# EAGLE board untitled (EAGLE 6.4)
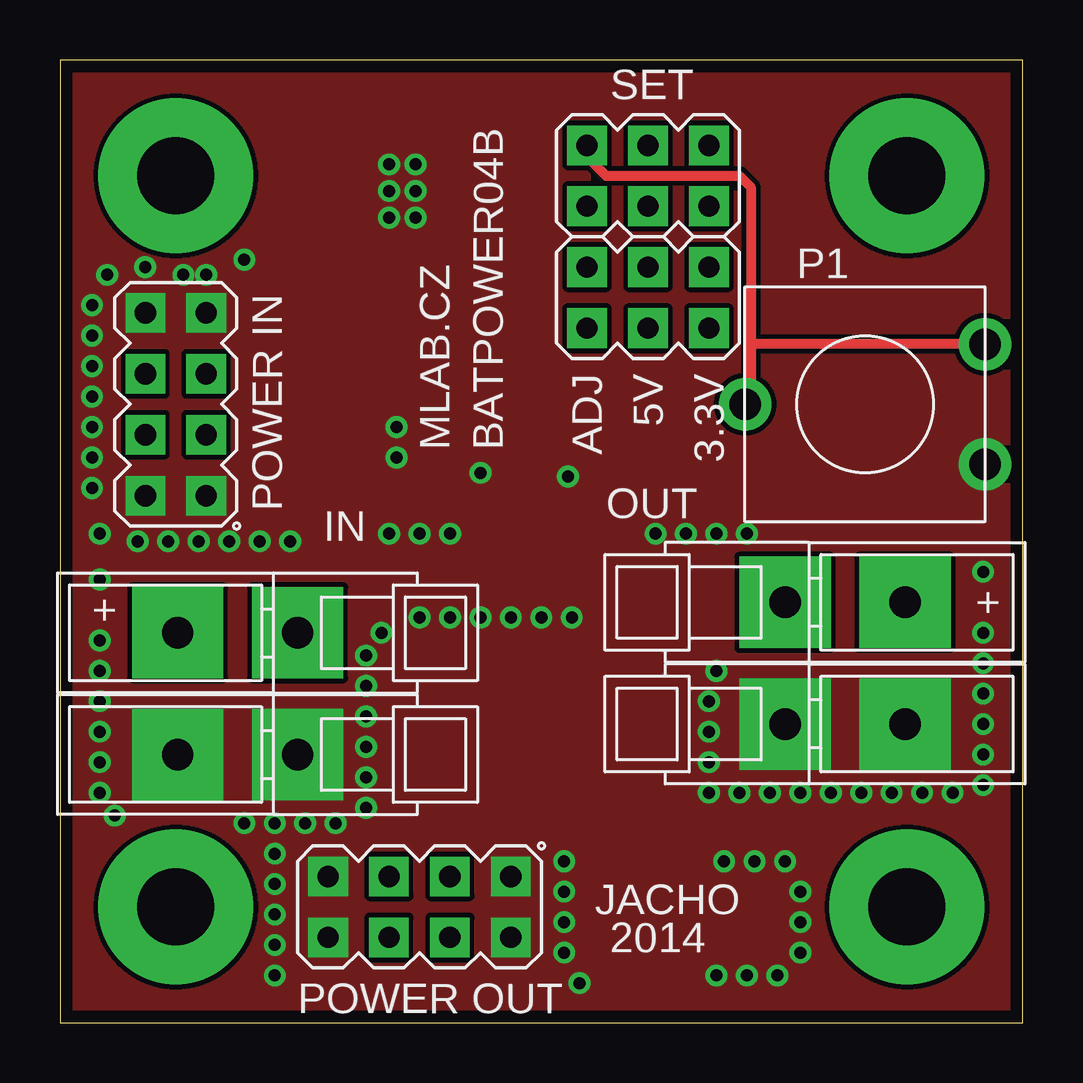
[diagram p0: board, top side]
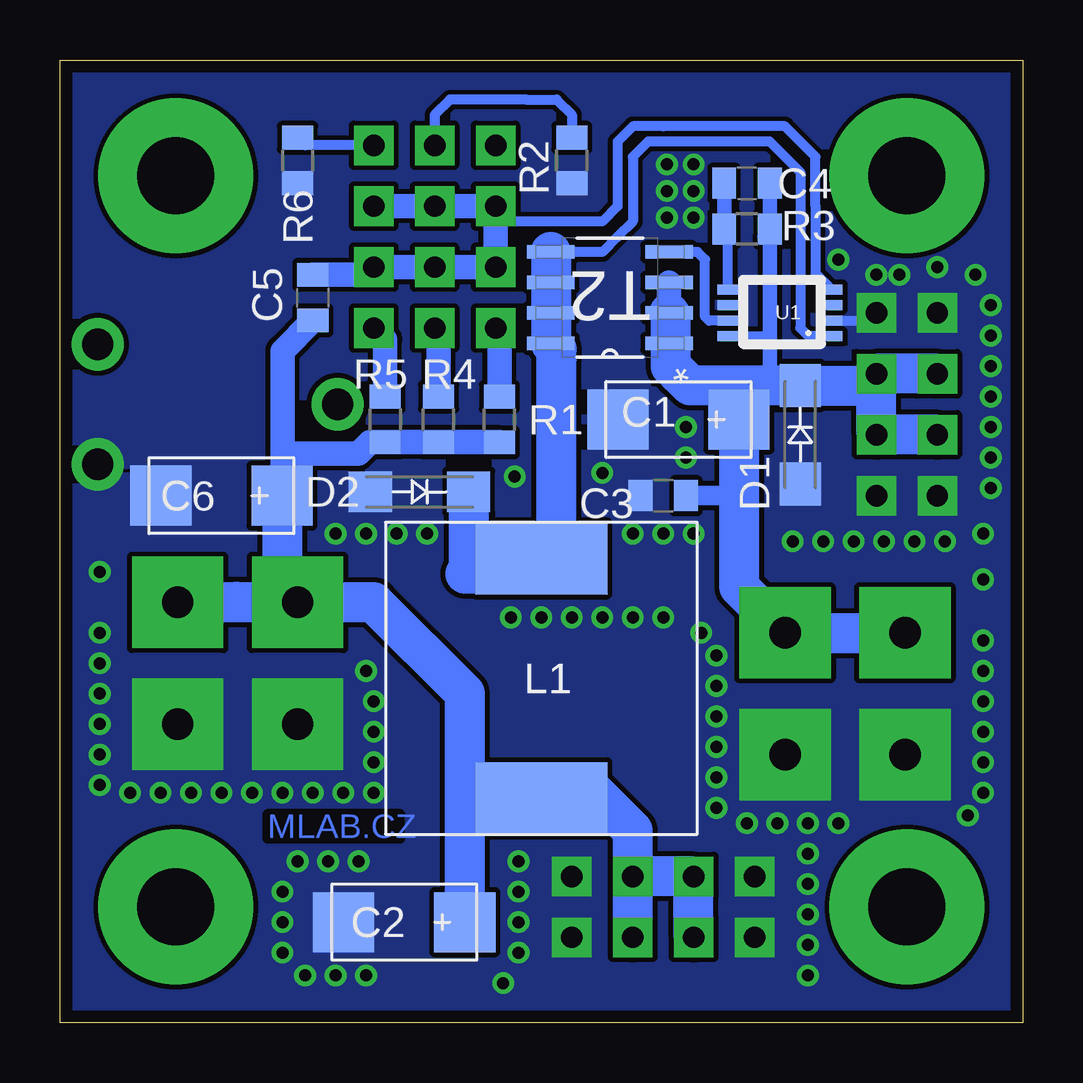
[diagram p1: board, bottom side, seen from below]

Size 40.13 x 40.13 mm. Coordinates in mm from the lower left corner, seen from the top.
Outline: 0,0 40.13,0 40.13,40.13 0,40.13 0,0
Copper layers (1*16): Top 0.035mm / dielectric 1.5mm / Bottom 0.035mm
Design rules "jacho35": minimum track width 8mil, minimum drill 16mil, track to track 8mil, track to pad 8mil, pad to pad 8mil, via to via 8mil, smd to smd 8mil, copper to edge 20mil, drill to drill 8mil, minimum pad ring 10mil, minimum via ring 8mil, stop-mask expansion 4mil, vias tented up to drill 25mil, thermal gap 0mil

## Footprints (pad centres in the part's own frame; a part is rotated, then mirrored left to right if it is on the bottom)
C = smd 2.55 x 2.5: + 2.525,0; - -2.525,0
C0805 = smd 0.991 x 1.295: 1 -0.95,0; 2 0.95,0
SMA = smd 1.8 x 1.7: A -2.05,0; K 2.05,0
DE1205-10 = smd 3 x 5.5: P$1 -5,0; P$2 5,0
TRIM_CA9MTV10 = drill 1.3 pad 2.184: 1 -2.5,-5; 2 0,5; 3 2.5,-5
0805 = smd 0.991 x 1.295: 1 -0.95,0; 2 0.95,0
MA04-2 = drill 0.889 pad 1.651 square: 1 -3.81,-1.27; 2 -3.81,1.27; 3 -1.27,-1.27; 4 -1.27,1.27; 5 1.27,-1.27; 6 1.27,1.27; 7 3.81,-1.27; 8 3.81,1.27
WAGO256 = drill 1.3 pad 3.81 square: 1 2.54,0; A1 -2.46,0
MA03-2 = drill 0.889 pad 1.651 square: 1 -2.54,-1.27; 2 -2.54,1.27; 3 0,-1.27; 4 0,1.27; 5 2.54,-1.27; 6 2.54,1.27
SO8 = smd 1.981 x 0.559: 1 -2.464,1.905; 2 -2.464,0.635; 3 -2.464,-0.635; 4 -2.464,-1.905; 5 2.464,-1.905; 6 2.464,-0.635; 7 2.464,0.635; 8 2.464,1.905
MSOP-8 = smd 0.42 x 0.89: 1 -0.975,-1.95; 2 -0.325,-1.95; 3 0.325,-1.95; 4 0.975,-1.95; 5 0.975,2.375; 6 0.325,2.375; 7 -0.325,2.375; 8 -0.975,2.375
SROUB3M = drill 3.2 pad 6.452: P$1 0,0

## Placement (x,y rotation side)
C1  47u  [C]  14.35,25.15 0 bottom
C2  100u  [C]  25.78,4.19 0 bottom
C3  100n  [C0805]  14.99,21.97 0 bottom
C4  1n  [C0805]  11.49,34.99 0 bottom
C5  100p  [C0805]  29.59,30.23 270 bottom
C6  100u  [C]  33.4,21.97 0 bottom
D1  M4  [SMA]  9.27,24.51 90 bottom
D2  15MQ040N  [SMA]  25.15,22.13 0 bottom
L1  22u  [DE1205-10]  20.07,14.35 270 bottom
P1  [TRIM_CA9MTV10]  33.56,25.78 90 top
R1  [0805]  21.81,25.15 270 bottom
R2  20k  [0805]  18.8,35.94 90 bottom
R3  22k  [0805]  11.49,33.08 0 bottom
R4  60k4  [0805]  24.35,25.15 270 bottom
R5  33k  [0805]  26.57,25.15 270 bottom
R6  20k  [0805]  30.23,35.94 90 bottom
SV1  [MA04-2]  4.83,25.78 90 top
SV2  [MA04-2]  14.99,4.83 180 top
SV3  [WAGO256]  7.37,11.18 0 top
SV4  [WAGO256]  7.37,16.26 0 top
SV5  [WAGO256]  32.77,12.45 180 top
SV6  [WAGO256]  32.77,17.53 180 top
SW1  [MA03-2]  24.51,30.23 0 top
SW2  [MA03-2]  24.51,35.31 0 top
T2  IRF7416  [SO8]  17.21,30.23 180 bottom
U1  LM3485  [MSOP-8]  9.91,29.59 90 bottom
X1  SROUB3M  [SROUB3M]  4.83,4.83 0 top
X2  SROUB3M  [SROUB3M]  35.31,4.83 0 top
X3  SROUB3M  [SROUB3M]  4.83,35.31 0 top
X4  SROUB3M  [SROUB3M]  35.31,35.31 0 top

## Library data of the parts
C1-C6 = moje_C
D1 X1-X4 = moje
D2 = moje_diody
L1 = moje_L
P1 = moje_pot
R1-R6 = moje_R
SV1 SV2 = moje_hrebinky; OC_FARNELL: unknown; OC_NEWARK: unknown
SV3-SV6 = moje_konektory
SW1 SW2 = moje_hrebinky
T2 = moje_T
U1 = ciza_io

## Nets
GND: C1.- C2.- C3.1 C6.- D1.A D2.A P1.1 R2.1 R6.1 SV1.1 SV1.2 SV1.7 SV1.8 SV2.1 SV2.2 SV2.7 SV2.8 SV3.1 SV3.A1 SV5.1 SV5.A1 U1.2 U1.6
N$1: T2.4 U1.7
N$2: C1.+ C3.2 C4.2 D1.K R3.2 SV1.3 SV1.4 SV1.5 SV1.6 SV4.1 SV4.A1 T2.1 T2.2 T2.3 U1.8
N$3: C5.1 SW1.2 SW1.4 SW1.6 SW2.1 SW2.3 SW2.5 U1.4
N$4: C4.1 R3.1 U1.5
N$5: R1.1 SW1.1
N$6: D2.K L1.P$1 T2.5 T2.6 T2.7 T2.8 U1.1
N$7: R4.1 SW1.3
N$8: C2.+ C5.2 C6.+ L1.P$2 R1.2 R4.2 R5.2 SV2.3 SV2.4 SV2.5 SV2.6 SV6.1 SV6.A1
N$9: R5.1 SW1.5
N$10: R2.2 SW2.4
N$11: R6.2 SW2.6
N$12: P1.2 P1.3 SW2.2

## Tracks (layer width: path | path; a pad name or v marks a point on that pad's centre or on a via)
GND  (via drill 0.5)
  Bottom 0.406: U1.2 6.1,29.27 SV1.7
  other vias: 13.72,33.56 14.83,33.56 13.72,35.78 6.1,31.18 7.68,31.81 5.14,31.18 1.33,28.64 38.48,18.8 38.48,16.26 38.48,14.99 38.48,13.72 38.48,12.45 38.48,11.18 38.48,9.91 37.21,9.59 35.94,9.59 34.67,9.59 33.4,9.59 32.13,9.59 30.86,9.59 29.59,9.59 28.32,9.59 27.05,9.59 27.05,10.86 27.05,12.13 27.05,13.4 27.37,14.67 1.65,18.48 1.65,15.94 1.65,14.67 1.65,13.4 1.65,12.13 1.65,10.86 1.65,9.59 2.29,8.64 7.68,8.32 8.95,8.32 10.22,8.32 11.49,8.32 12.76,8.95 12.76,10.22 12.76,11.49 12.76,12.76 12.76,14.03 12.76,15.3 13.4,16.26 16.26,16.89 17.53,16.89 18.8,16.89 20.07,16.89 21.34,16.89 14.99,16.89 3.24,20.07 4.51,20.07 5.78,20.07 7.05,20.07 8.32,20.07 9.59,20.07 17.53,22.92 14.03,24.83 14.03,23.56 13.72,20.38 14.99,20.38 16.26,20.38 3.56,31.5 1.97,31.18 13.72,34.67 1.33,29.91 8.95,7.05 8.95,5.78 8.95,4.51 8.95,3.24 8.95,1.97 21.02,6.73 27.69,6.73 28.96,6.73 30.23,6.73 30.86,5.46 30.86,4.19 30.86,2.92 29.91,1.97 28.64,1.97 27.37,1.97 24.83,20.38 26.1,20.38 27.37,20.38 28.64,20.38 1.65,20.38 1.33,27.37 1.33,26.1 1.33,24.83 1.33,23.56 1.33,22.29 21.02,5.46 21.02,4.19 21.02,2.92 21.65,1.65 14.83,35.78 14.83,34.67 21.18,22.76
  pour Bottom: -0.25,40.39 40.39,40.39 40.39,-0.25 -0.25,-0.25
  pour Top: 0.38,40.39 0.38,-0.25 40.39,-0.25 40.39,39.75
N$1
  Bottom 0.406: U1.7 13.07,29.27 13.24,29.43 13.24,31.81 13.56,32.13 T2.4
N$2
  Bottom 0.406: 10.86,32.77 R3.2 | C1.+ 11.83,26.55 11.81,26.56 | 14.35,27.05 11.81,27.05 | U1.8 12.11,28.62 10.84,28.62 10.54,28.32
  Bottom 0.61: 11.81,27.05 11.81,26.56 11.83,26.55 | C4.2 R3.2 10.54,28.32 10.54,27.2 9.91,26.56
  Bottom 0.813: C3.2 11.83,21.97
  Bottom 1.016: T2.2 T2.3
  Bottom 1.676: SV1.6 SV1.5 6.1,26.42 | SV1.4 SV1.3 6.1,26.42 | 6.1,26.42 6.24,26.56 D1.K 9.91,26.56 11.18,26.56 11.81,26.56 12.45,26.56 13.86,26.56 14.35,27.05 14.67,27.37 | C1.+ 11.83,21.97 11.83,18.81 11.83,18.18 SV4.1 SV4.A1 | 14.67,27.37 14.67,29.51 T2.2 | 14.67,27.37 14.67,28.24 T2.1
N$3
  Bottom 0.406: SW2.1 21.34,33.4 17.53,33.4 16.89,34.04 16.89,36.73 16.26,37.37 14.99,37.37 9.91,37.37 8.64,36.1 8.64,35.31 8.64,34.04 8.64,31.25 U1.4
  Bottom 1.016: C5.1 27.37,31.18 SW1.6 | SW1.6 SW1.4 | SW1.6 SW1.2 21.97,32.77 SW2.1 SW2.3 SW2.5
N$4
  Bottom 0.406: U1.5 12.28,32.92 R3.1
  Bottom 0.61: C4.1 R3.1
N$5
  Bottom 1.016: R1.1 21.81,26.42 21.81,28.8 SW1.1
N$6
  Bottom 0.406: U1.1 8.93,28.62 8.95,28.64 9.27,28.96 9.27,35.47 9.91,36.1 10.54,36.73 13.56,36.73 15.62,36.73 16.26,36.1 16.26,33.4 16.89,32.77 17.53,32.13 T2.5
  Bottom 1.676: L1.P$1 23.24,18.72 | 23.24,18.72 20.15,18.72 19.43,19.43 19.43,27.69 19.43,28.08 T2.8 T2.7 T2.6 T2.5 | D2.K 23.1,18.86 23.24,18.72
N$7
  Bottom 1.016: R4.1 24.35,26.42 24.35,28.8 SW1.3
N$8
  Bottom 1.016: R1.2 R4.2 R5.2 27.05,24.2 27.21,24.2 27.69,23.72 30.7,23.72 30.86,23.4 | C6.+ 30.86,21.99 30.86,23.4 | 30.86,23.4 30.86,28.01 C5.2
  Bottom 1.676: C2.+ 23.26,9.91 | 23.26,9.91 23.26,11.19 23.26,13.73 27.05,17.53 SV6.1 | SV2.6 SV2.5 SV2.3 | SV2.4 SV2.3 | SV2.3 16.26,8 18.16,9.91 18.8,9.91 19.43,9.27 19.99,9.27 L1.P$2 22.7,9.35 23.26,9.91 | SV6.1 30.86,17.53 | 30.86,17.53 SV6.1 | 30.86,17.53 32.77,17.53 | 32.77,17.53 SV6.A1 | 32.78,17.54 32.77,17.53 | C6.+ 30.88,17.54 30.86,17.53
N$9
  Bottom 1.016: R5.1 26.57,26.42 26.57,28.48 SW1.5
N$10
  Bottom 0.406: 18.48,36.89 R2.2 18.8,37.85 19.43,38.48 20.7,38.48 23.88,38.48 24.51,37.85 SW2.4
N$11
  Bottom 0.406: SW2.6 29.91,36.58 R6.2
N$12
  Top 0.406: SW2.2 21.97,36.1 22.76,35.31 28.32,35.31 28.8,34.83 28.8,28.16 | 28.8,28.16 28.8,26.02 P1.2 | P1.3 28.92,28.28 28.8,28.16

## Text on the board
Bottom: MLAB.CZ
tPlace: SET | ADJ | 5V | 3.3V | MLAB.CZ | BATPOWER04B | POWER IN | IN | OUT | + | + | JACHO | 2014 | POWER OUT